# Altium PCB LP_ECG-X02.PcbDoc (part 2 of 2)
Units mil, origin at the board's own origin, x right, y up, seen from the top; angles counter-clockwise.
Board outline 960.05 x 640 mil, 2 copper layers (Top Layer, Bottom Layer), stack 5.556 mil thick; 71 components, 50 nets, 250 pads, 54 vias.
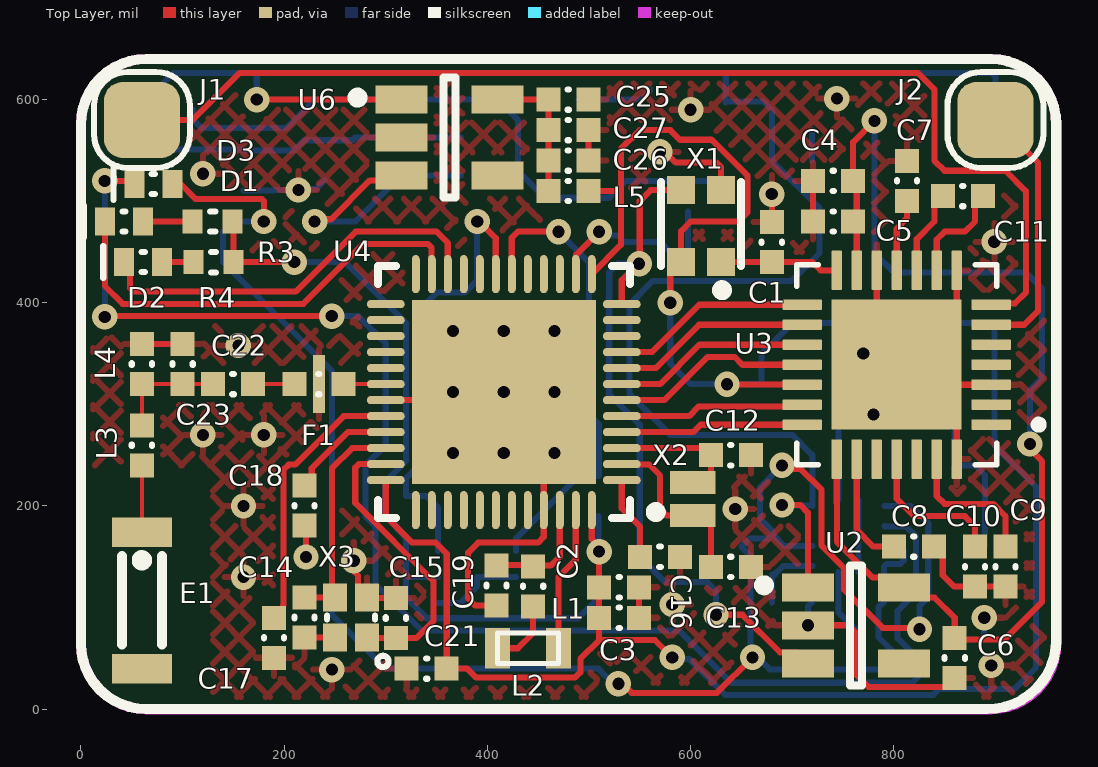
[diagram p0: Top Layer view]

## Part data (continued)
L1: library part I-0402(1005), "General Purpose Inductor, 0.015uH, 5%, 1 Element, Ferrite-Core, SMD, 0402", Case Code (Imperial)=0402, Case Code (Metric)=1005, Current Rating=320mA, DC Resistance (DCR)=460mR, Inductance Tolerance=5%, Manufacturer="Taiyo Yuden", Manufacturer Part Number=HK100515NJ-T, Max DC Current=300mA, Max Operating Temperature=125°C, Min Operating Temperature=-55°C, Package Quantity=10000, Self Resonant Frequency=2.3GHz, Supplier Part Number 1=587-1521-1-ND, Test Frequency=100MHz, Body Material=Ceramic, Case/Package=0402, Category="Fixed Inductors", ComponentLink1Description=https://datasheet.ciiva.com:443/pdfs/VipMasterIC/IC/TAIY/TAIY-S-A0009098652/TAIY-S-A0009098648-1.pdf?src-supplier=IHS+Markit, ComponentLink1URL=https://datasheet.ciiva.com:443/pdfs/VipMasterIC/IC/TAIY/TAIY-S-A0009098652/TAIY-S-A0009098648-1.pdf?src-supplier=IHS+Markit, ComponentLink2Description=https://datasheet.ciiva.com/6688/hk100515nj-t-ss-6688640.pdf?src-supplier=Digi-Key, ComponentLink2URL=https://datasheet.ciiva.com/6688/hk100515nj-t-ss-6688640.pdf?src-supplier=Digi-Key, ComponentLink3Description=https://datasheet.ciiva.com/8498/hk100515nj-t-ss-8498917.pdf?src-supplier=Avnet, ComponentLink3URL=https://datasheet.ciiva.com/8498/hk100515nj-t-ss-8498917.pdf?src-supplier=Avnet, ComponentLink4Description=https://datasheet.ciiva.com/26871/getdatasheetpartid-645793-26871605.pdf?src-supplier=Verical, ComponentLink4URL=https://datasheet.ciiva.com/26871/getdatasheetpartid-645793-26871605.pdf?src-supplier=Verical, ComponentLink5Description=https://datasheet.ciiva.com/15986/1443hk100515nj-t-15986294.pdf?src-supplier=Onlinecomponents.com, ComponentLink5URL=https://datasheet.ciiva.com/15986/1443hk100515nj-t-15986294.pdf?src-supplier=Onlinecomponents.com, ComponentLink6Description=https://datasheet.ciiva.com/30215/1387hk100515nj-t-30215366.pdf?src-supplier=Onlinecomponents.com, ComponentLink6URL=https://datasheet.ciiva.com/30215/1387hk100515nj-t-30215366.pdf?src-supplier=Onlinecomponents.com, Core Material=Ferrite,Ceramic, DC Current=320mA, Depth=0.55mm, Halogen Free="Halogen Free", Height=0.5mm, Height - Seated (Max)=0.022inch, Inductance=15nH, Lead Free=Exempt, Length=1.05mm, Military Standard=Not, Mount="Surface Mount", Number of Pins=2, Packaging="Tape and Reel", Pricing 1="1=0.10000, 10=0.02900, 100=0.01960, 500=0.01582, 1000=0.01351, 2500=0.01208 (USD)", Q Factor=8, Radiation Hardening=No, REACH SVHC=Unknown, RoHS=Yes, Shielding=Unshielded, Stock 1=127125, Supplier 1=Digi-Key, Termination=SMD/SMT, Tolerance=5%, Width=0.02inch
L2: library part I-0603(1608), "General Purpose Inductor, 10uH, 10%, 1 Element, Ferrite-Core, SMD, 0603", Case Code (Imperial)=0603, Case Code (Metric)=1608, Current Rating=380mA, DC Resistance (DCR)=468mR, Inductance Tolerance=10%, Manufacturer="Taiyo Yuden", Manufacturer Part Number=CBMF1608T100K, Max Operating Temperature=105°C, Min Operating Temperature=-40°C, Package Quantity=3000, Saturation Current=115mA, Self Resonant Frequency=32MHz, Supplier Part Number 1=587-1720-1-ND, Test Frequency=2.52MHz, Case/Package=0603, Category="Fixed Inductors", ComponentLink1Description=https://datasheet.ciiva.com:443/pdfs/VipMasterIC/IC/TAIY/TAIY-S-A0009098652/TAIY-S-A0009097792-1.pdf?src-supplier=IHS+Markit, ComponentLink1URL=https://datasheet.ciiva.com:443/pdfs/VipMasterIC/IC/TAIY/TAIY-S-A0009098652/TAIY-S-A0009097792-1.pdf?src-supplier=IHS+Markit, ComponentLink2Description=https://datasheet.ciiva.com/1040/cbmf1608t100k-ss-1040608.pdf?src-supplier=Digi-Key, ComponentLink2URL=https://datasheet.ciiva.com/1040/cbmf1608t100k-ss-1040608.pdf?src-supplier=Digi-Key, ComponentLink3Description=https://datasheet.ciiva.com/26871/getdatasheetpartid-638595-26871191.pdf?src-supplier=Verical, ComponentLink3URL=https://datasheet.ciiva.com/26871/getdatasheetpartid-638595-26871191.pdf?src-supplier=Verical, ComponentLink4Description=https://datasheet.ciiva.com/15981/521cbmf1608t100k-15981672.pdf?src-supplier=Onlinecomponents.com, ComponentLink4URL=https://datasheet.ciiva.com/15981/521cbmf1608t100k-15981672.pdf?src-supplier=Onlinecomponents.com, ComponentLink5Description=https://datasheet.ciiva.com/46395/1521599-46395181.pdf?src-supplier=Element14, ComponentLink5URL=https://datasheet.ciiva.com/46395/1521599-46395181.pdf?src-supplier=Element14, Composition=Wirewound, Core Material=Ferrite, DC Current=380mA, Depth=1mm, Halogen Free="Halogen Free", Height=0.8mm, Height - Seated (Max)=0.039inch, Inductance=10uH, Lead Free="Lead Free", Length=0.063inch, Max DC Current=380mA, Military Standard=Not, Mount="Surface Mount", Packaging="Tape and Reel", Pricing 1="1=0.27000, 10=0.23900, 100=0.16450, 500=0.14054, 1000=0.10764 (USD)", Radiation Hardening=No, REACH SVHC=Unknown, RoHS=Yes, Shielding=Unshielded, Stock 1=148191, Supplier 1=Digi-Key, Termination=SMD/SMT, Tolerance=10%, Width=0.031inch
L3: library part I-0402(1005), "General Purpose Inductor, 0.0039uH, 5%, 1 Element, Ceramic-Core, SMD, 0402", Case/Size Code=0402, DC Resistance (DCR)=66mR, Inductor Application="RF INDUCTOR", Inductor Type="GENERAL PURPOSE INDUCTOR", Manufacturer=Bourns, Manufacturer Part Number=CW100505-3N9J, Max Operating Temperature=125°C, Min Operating Temperature=-55°C, Package Height=0.5mm, Package Length=1mm, Package Style=SMTMeter, Package Width=0.55mm, Rated Current-Max=840mA, Self Resonant Frequency=5.8GHz, Supplier Part Number 1=CW100505-3N9JCT-ND, Test Frequency=250MHz, Tolerance=5%, Category="Fixed Inductors", ComponentLink1Description=https://datasheet.ciiva.com:443/pdfs/VipMasterIC/IC/BOUR/BOUR-S-A0006522652/BOUR-S-A0006522652-1.pdf?src-supplier=IHS+Markit, ComponentLink1URL=https://datasheet.ciiva.com:443/pdfs/VipMasterIC/IC/BOUR/BOUR-S-A0006522652/BOUR-S-A0006522652-1.pdf?src-supplier=IHS+Markit, ComponentLink2Description=https://datasheet.ciiva.com/7848/1758342-7848024.pdf?src-supplier=Element14, ComponentLink2URL=https://datasheet.ciiva.com/7848/1758342-7848024.pdf?src-supplier=Element14, ComponentLink3Description=https://datasheet.ciiva.com/6688/cw100505-6688918.pdf?src-supplier=Digi-Key, ComponentLink3URL=https://datasheet.ciiva.com/6688/cw100505-6688918.pdf?src-supplier=Digi-Key, ComponentLink4Description=https://datasheet.ciiva.com/6688/cw100505-6688919.pdf?src-supplier=Digi-Key, ComponentLink4URL=https://datasheet.ciiva.com/6688/cw100505-6688919.pdf?src-supplier=Digi-Key, ComponentLink5Description=https://datasheet.ciiva.com/3079/cw100505-3079090.pdf?src-supplier=Avnet, ComponentLink5URL=https://datasheet.ciiva.com/3079/cw100505-3079090.pdf?src-supplier=Avnet, ComponentLink6Description=https://datasheet.ciiva.com/3079/cw100505-3079776.pdf?src-supplier=Avnet, ComponentLink6URL=https://datasheet.ciiva.com/3079/cw100505-3079776.pdf?src-supplier=Avnet, Construction=Chip, Core Material=Ceramic, Inductance=0.0039uH, JESD-609 Code=e4, Number of Functions=1, Number of Pins=2, Packaging="Tape and Reel", Pricing 1="1=0.34000, 10=0.29900, 25=0.26160, 50=0.22440, 100=0.20570, 250=0.18700, 500=0.17578, 1000=0.13464, 2500=0.12716 (USD)", Quality Factor-Min (at L-nom)=20, REACH SVHC=Yes, RoHS=Yes, RoHS Compliant=Yes, Shape/Size Description="RECTANGULAR PACKAGE", Shielding=Unshielded, Stock 1=14179, Supplier 1=Digi-Key, Surface Mount=Yes, Terminal Finish=Gold, Terminal Placement="Dual Ended", Termination="One Surface"
L4: library part I-0402(1005), "General Purpose Inductor, 0.0027uH, 2%, 1 Element, SMD, 0402", DC Resistance (DCR)=47mR, Inductor Application="RF INDUCTOR", Inductor Type="GENERAL PURPOSE INDUCTOR", Manufacturer=Murata, Manufacturer Part Number=LQW15AN2N7G8ZD, Max Operating Temperature=125°C, Min Operating Temperature=-55°C, Rated Current-Max=1.5A, Self Resonant Frequency=14GHz, Supplier Part Number 1=490-15398-1-ND, Test Frequency=100MHz, Tolerance=2%, Category="Fixed Inductors", ComponentLink1Description=https://datasheet.ciiva.com:443/pdfs/VipMasterIC/IC/MURE/MURE-S-A0006159688/MURE-S-A0006159688-1.pdf?src-supplier=IHS+Markit, ComponentLink1URL=https://datasheet.ciiva.com:443/pdfs/VipMasterIC/IC/MURE/MURE-S-A0006159688/MURE-S-A0006159688-1.pdf?src-supplier=IHS+Markit, Inductance=0.0027uH, Number of Functions=1, Number of Pins=2, Pricing 1="1=0.27000, 10=0.24300, 25=0.21560, 50=0.18320, 100=0.16170, 250=0.14824, 500=0.13476, 1000=0.11319, 2500=0.09702 (USD)", Quality Factor-Min (at L-nom)=28, REACH SVHC=Yes, Reference Standard=AEC-Q200, RoHS=Yes, RoHS Compliant=Yes, Shape/Size Description="RECTANGULAR PACKAGE", Shielding=Unshielded, Stock 1=26747, Supplier 1=Digi-Key, Surface Mount=Yes, Terminal Placement="Dual Ended", Termination="One Surface"
L5: library part "Inductor Iron", "General Purpose Inductor, 1uH, 20%, 1 Element, Ferrite-Core, SMD, 0402", Case Code (Imperial)=0402, Case Code (Metric)=1005, Current Rating=450mA, DC Resistance (DCR)=455mR, Manufacturer=TDK, Manufacturer Part Number=MLZ1005M1R0WT000, Max Operating Temperature=125°C, Min Operating Temperature=-55°C, Package Quantity=10000, Saturation Current=100mA, Self Resonant Frequency=170MHz, Supplier Part Number 1=445-6379-1-ND, Test Frequency=2MHz, Tolerance=20%, Case/Package=0402, Category="Fixed Inductors", ComponentLink1Description=https://datasheet.ciiva.com:443/pdfs/VipMasterIC/IC/TDKC/TDKC-S-A0006811779/TDKC-S-A0006811779-1.pdf?src-supplier=IHS+Markit, ComponentLink1URL=https://datasheet.ciiva.com:443/pdfs/VipMasterIC/IC/TDKC/TDKC-S-A0006811779/TDKC-S-A0006811779-1.pdf?src-supplier=IHS+Markit, ComponentLink2Description=https://datasheet.ciiva.com/29699/inductor-commercial-decoupling-mlz-en-29699052.pdf?src-supplier=Digi-Key, ComponentLink2URL=https://datasheet.ciiva.com/29699/inductor-commercial-decoupling-mlz-en-29699052.pdf?src-supplier=Digi-Key, ComponentLink3Description=https://datasheet.ciiva.com/29699/inductor-commercial-decoupling-mlz-en-29699053.pdf?src-supplier=Digi-Key, ComponentLink3URL=https://datasheet.ciiva.com/29699/inductor-commercial-decoupling-mlz-en-29699053.pdf?src-supplier=Digi-Key, Core Material=Ferrite, Height - Seated (Max)=0.022inch, Inductance=1uH, Length=0.039inch, Mount="Surface Mount", Packaging="Tape and Reel", Pricing 1="1=0.29000, 10=0.25800, 100=0.17710, 500=0.15134, 1000=0.11592, 2500=0.10948 (USD)", RoHS=Yes, Shielding=Shielded, Supplier 1=Digi-Key, Width=0.02inch
L6: library part WIRELESS_CHARGING_COIL, "General Purpose Inductor, 11.8uH, 10%, 1 Element", Current Rating=700mA, DC Resistance (DCR)=750mR, Inductance=11.8uH, Inductance Tolerance=10%, Manufacturer="Wurth Electronics", Manufacturer Part Number=760308101219, Max Operating Temperature=105°C, Min Operating Temperature=-20°C, Saturation Current=1.5A, Self Resonant Frequency=22MHz, Supplier Part Number 1=732-9675-ND, ComponentLink1Description=https://datasheet.ciiva.com:443/pdfs/VipMasterIC/IC/MIDC/MIDC-S-A0003386501/MIDC-S-A0003386501-1.pdf?src-supplier=IHS+Markit, ComponentLink1URL=https://datasheet.ciiva.com:443/pdfs/VipMasterIC/IC/MIDC/MIDC-S-A0003386501/MIDC-S-A0003386501-1.pdf?src-supplier=IHS+Markit, ComponentLink2Description=http://www.farnell.com/datasheets/2039993.pdf?src-supplier=Farnell, ComponentLink2URL=http://www.farnell.com/datasheets/2039993.pdf?src-supplier=Farnell, ComponentLink3Description=http://www.farnell.com/datasheets/2039993.pdf?src-supplier=Element14, ComponentLink3URL=http://www.farnell.com/datasheets/2039993.pdf?src-supplier=Element14, Height=0.02inch, Logic Function=Receiver, Pricing 1="1=7.43000, 10=7.04000, 32=6.49000, 64=5.94000, 128=5.17000 (USD)", REACH SVHC=Unknown, RoHS=Yes, Stock 1=168, Supplier 1=Digi-Key, Tolerance=10%
R1 R2: library part R-0402(1005), "Fixed Resistor, Metal Glaze/thick Film, 0.0625W, 10000ohm, 50V, 1% +/-Tol, 100ppm/Cel, Surface Mount, 0402", Manufacturer=Yageo, Manufacturer Part Number=AC0402FR-0710KL, Max Operating Temperature=155°C, Min Operating Temperature=-55°C, Package Height=0.32mm, Package Length=1mm, Package Shape=Rectangular, Package Style=SMTMeter, Package Width=0.5mm, Rated Power Dissipation (P)=62.5mW, Rated Temperature=70°C, Resistor Type="FIXED RESISTOR", Supplier Part Number 1=YAG3436CT-ND, Temperature Coefficient=100ppm/°C, Tolerance=1%, Working Voltage=50V, Additional Feature="LASER TRIMMABLE", Category="Chip SMD Resistors", ComponentLink1Description=https://datasheet.ciiva.com:443/pdfs/VipMasterIC/IC/YAGO/YAGO-S-A0003597364/YAGO-S-A0003597364-1.pdf?src-supplier=IHS+Markit, ComponentLink1URL=https://datasheet.ciiva.com:443/pdfs/VipMasterIC/IC/YAGO/YAGO-S-A0003597364/YAGO-S-A0003597364-1.pdf?src-supplier=IHS+Markit, ComponentLink2Description=https://datasheet.ciiva.com/12656/pyu-ac-51-rohs-l-2-12656634.pdf?src-supplier=Mouser, ComponentLink2URL=https://datasheet.ciiva.com/12656/pyu-ac-51-rohs-l-2-12656634.pdf?src-supplier=Mouser, Construction=Chip, JESD-609 Code=e3, Mount="Surface Mount", Number of Pins=2, Packaging="Tape and Reel", Pricing 1="1=0.10000, 10=0.01900, 100=0.00780, 1000=0.00350, 2500=0.00304, 5000=0.00251 (USD)", Reference Standard=AEC-Q200, Resistance=10kR, RoHS=Yes, Size Code=0402, Stock 1=281455, Supplier 1=Digi-Key, Technology="METAL GLAZE/THICK FILM", Terminal Finish=Nickel, Termination=Wraparound
R3 R4: library part R-0402(1005), "Fixed Resistor, Thin Film, 0.0625W, 422ohm, 50V, 0.1% +/-Tol, 25ppm/Cel, Surface Mount, 0402", Case Code (Imperial)=0402, Case Code (Metric)=1005, Manufacturer=Yageo, Manufacturer Part Number=RT0402BRD07422RL, Max Operating Temperature=125°C, Min Operating Temperature=-55°C, Power Rating=62.5mW, Supplier Part Number 1=YAG4263CT-ND, Temperature Coefficient=25ppm/°C, Tolerance=0.1%, Voltage Rating=50V, Case/Package=0402, Category="Chip SMD Resistors", ComponentLink1Description=https://datasheet.ciiva.com:443/pdfs/VipMasterIC/IC/YAGO/YAGO-S-A0008510989/YAGO-S-A0008510989-1.pdf?src-supplier=IHS+Markit, ComponentLink1URL=https://datasheet.ciiva.com:443/pdfs/VipMasterIC/IC/YAGO/YAGO-S-A0008510989/YAGO-S-A0008510989-1.pdf?src-supplier=IHS+Markit, ComponentLink2Description=https://datasheet.ciiva.com/12705/pyu-rt-1-to-0-05-rohs-l-4-12705867.pdf?src-supplier=Mouser, ComponentLink2URL=https://datasheet.ciiva.com/12705/pyu-rt-1-to-0-05-rohs-l-4-12705867.pdf?src-supplier=Mouser, Height=350um, Lead Free="Lead Free", Length=1mm, Packaging="Tape and Reel", Pricing 1="1=0.39000, 10=0.27800, 100=0.11140, 1000=0.05488, 2500=0.05084, 5000=0.04600 (USD)", Resistance=422R, RoHS=Yes, Stock 1=9302, Supplier 1=Digi-Key, Termination=SMD/SMT, Voltage Rating (DC)=50V, Width=500um
R5 R6 R7 R8: library part R-0402(1005), "Fixed Resistor, Metal Glaze/thick Film, 0.0625W, 0ohm, Surface Mount, 0402", Manufacturer=Yageo, Manufacturer Part Number=AC0402JR-070RL, Max Operating Temperature=155°C, Min Operating Temperature=-55°C, Package Height=0.32mm, Package Length=1mm, Package Shape=Rectangular, Package Style=SMTMeter, Package Width=0.5mm, Rated Power Dissipation (P)=62.5mW, Rated Temperature=70°C, Resistor Type="FIXED RESISTOR", Supplier Part Number 1=311-0.0LBCT-ND, Category="Chip SMD Resistors", ComponentLink1Description=https://datasheet.ciiva.com:443/pdfs/VipMasterIC/IC/YAGO/YAGO-S-A0003597364/YAGO-S-A0003597364-1.pdf?src-supplier=IHS+Markit, ComponentLink1URL=https://datasheet.ciiva.com:443/pdfs/VipMasterIC/IC/YAGO/YAGO-S-A0003597364/YAGO-S-A0003597364-1.pdf?src-supplier=IHS+Markit, ComponentLink2Description=http://www.mouser.com/ds/2/447/yageodocoutput-1111992.pdf?src-supplier=Mouser, ComponentLink2URL=http://www.mouser.com/ds/2/447/yageodocoutput-1111992.pdf?src-supplier=Mouser, ComponentLink3Description=http://www.yageo.com/NewPortal/yageodocoutput?fileName=/pdf/R-Chip/PYu-AC_51_RoHS_L_6.pdf&src-supplier=Digi-Key, ComponentLink3URL=http://www.yageo.com/NewPortal/yageodocoutput?fileName=/pdf/R-Chip/PYu-AC_51_RoHS_L_6.pdf&src-supplier=Digi-Key, ComponentLink4Description=http://www.yageo.com/documents/recent/PYu-AC_51_RoHS_L_2_revised.pdf?src-supplier=Future+Electronics, ComponentLink4URL=http://www.yageo.com/documents/recent/PYu-AC_51_RoHS_L_2_revised.pdf?src-supplier=Future+Electronics, Construction=Chip, JESD-609 Code=e3, Mount="Surface Mount", Number of Pins=2, Packaging="Tape and Reel", Pricing 1="1=0.10000, 10=0.01800, 25=0.01320, 50=0.01000, 100=0.00740, 250=0.00564, 500=0.00450, 1000=0.00331, 5000=0.00238 (USD)", REACH SVHC=Yes, Reference Standard=AEC-Q200, Resistance=0R, RoHS=Yes, RoHS Compliant=Yes, Size Code=0402, Stock 1=1061562, Supplier 1=Digi-Key, Technology="METAL GLAZE/THICK FILM", Terminal Finish=Nickel, Termination=Wraparound
R9 R10: library part R-0402(1005), "Fixed Resistor, Metal Glaze/thick Film, 0.0625W, 1000000ohm, 50V, 1% +/-Tol, 100ppm/Cel, Surface Mount, 0402", Manufacturer=Yageo, Manufacturer Part Number=AC0402FR-071ML, Max Operating Temperature=155°C, Min Operating Temperature=-55°C, Package Height=0.32mm, Package Length=1mm, Package Shape=Rectangular, Package Style=SMTMeter, Package Width=0.5mm, Rated Power Dissipation (P)=62.5mW, Rated Temperature=70°C, Resistor Type="FIXED RESISTOR", Supplier Part Number 1=YAG3450CT-ND, Temperature Coefficient=100ppm/°C, Tolerance=1%, Working Voltage=50V, Additional Feature="LASER TRIMMABLE", Category="Chip SMD Resistors", ComponentLink1Description=https://datasheet.ciiva.com:443/pdfs/VipMasterIC/IC/YAGO/YAGO-S-A0003597364/YAGO-S-A0003597364-1.pdf?src-supplier=IHS+Markit, ComponentLink1URL=https://datasheet.ciiva.com:443/pdfs/VipMasterIC/IC/YAGO/YAGO-S-A0003597364/YAGO-S-A0003597364-1.pdf?src-supplier=IHS+Markit, ComponentLink2Description=http://components.arrow.com/part/dataview/0323_03348700?src-supplier=Arrow+Europe, ComponentLink2URL=http://components.arrow.com/part/dataview/0323_03348700?src-supplier=Arrow+Europe, ComponentLink3Description=http://www.yageo.com/documents/recent/PYu-AC_51_RoHS_L_2.pdf?src-supplier=Mouser, ComponentLink3URL=http://www.yageo.com/documents/recent/PYu-AC_51_RoHS_L_2.pdf?src-supplier=Mouser, ComponentLink4Description=http://www.yageo.com/NewPortal/yageodocoutput?fileName=/pdf/R-Chip/PYu-AC_51_RoHS_L_6.pdf&src-supplier=Digi-Key, ComponentLink4URL=http://www.yageo.com/NewPortal/yageodocoutput?fileName=/pdf/R-Chip/PYu-AC_51_RoHS_L_6.pdf&src-supplier=Digi-Key, ComponentLink5Description=http://www.yageo.com/documents/recent/PYu-AC_51_RoHS_L_2_revised.pdf?src-supplier=Future+Electronics, ComponentLink5URL=http://www.yageo.com/documents/recent/PYu-AC_51_RoHS_L_2_revised.pdf?src-supplier=Future+Electronics, Construction=Chip, JESD-609 Code=e3, Mount="Surface Mount", Number of Pins=2, Packaging="Tape and Reel", Pricing 1="1=0.10000, 10=0.01900, 100=0.00780, 1000=0.00350, 2500=0.00304, 5000=0.00251 (USD)", Reference Standard=AEC-Q200, Resistance=1MR, RoHS=Yes, Size Code=0402, Stock 1=11166, Supplier 1=Digi-Key, Technology="METAL GLAZE/THICK FILM", Terminal Finish=Nickel, Termination=Wraparound
U1: library part bceab6869a9cb85cf5675529ee35ce4, "TEMPERATURE SENSOR", Ambient Temperature Range High=+150°C, Ambient Temperature Range Low=-55°C, Manufacturer="Texas Instruments", Max Operating Temperature=150°C, Max Supply Voltage=5.5V, Min Supply Voltage=1.8V, Operating Supply Current=3.5-16uA, Package=DRV0006A, Supplier Part Number 1=296-51834-1-ND, Temperature="-55°C to +150°C", Automotive=No, Category=IC, ComponentLink1Description=https://www.ti.com:443/lit/ds/symlink/tmp117.pdf?src-supplier=IHS+Markit, ComponentLink1URL=https://www.ti.com:443/lit/ds/symlink/tmp117.pdf?src-supplier=IHS+Markit, ComponentLink2Description=Datasheet, ComponentLink2URL=http://www.ti.com/lit/ds/symlink/tmp117.pdf, ComponentLink3Description=http://www.ti.com/lit/gpn/tmp117?src-supplier=Digi-Key, ComponentLink3URL=http://www.ti.com/lit/gpn/tmp117?src-supplier=Digi-Key, Device Class L1=Sensors, Device Class L2="Temperature and Humidity Sensors", Device Class L3=unset, Digikey Description="TEMPERATURE SENSOR", Height=0.8mm, Interface=I2C,2-Wire,SMBus, Ipc Land Pattern Name=DFN200X200X80-6, Lead Free=Yes, Manufacturer Part Number=TMP117AIDRVR, Max Junction Temp=+150°C, Min Operating Temperature=-55°C, Mount="Surface Mount", Octopart=https://octopart.com/tmp117aidrvr-texas+instruments-95511044, Output Type=I2C, Packaging="Cut Tape", Pricing 1="1=8.02000, 5=7.07600, 10=6.25000, 25=5.07040, 50=4.48100, 100=4.36300, 500=3.65552, 1000=3.41968 (USD)", Resolution=16bits, RoHS=TRUE, Standoff Height=0mm, Stock 1=3558, Supplier 1=Digi-Key, Temperature Range High=+150°C, Temperature Range Low=-55°C
U2: "Fixed Positive LDO Regulator", Manufacturer=ABLIC, Supplier Part Number 1=1662-S-1318A18-M5T1U4CT-ND, ComponentLink1Description=https://datasheet.ciiva.com:443/pdfs/VipMasterIC/IC/ABLI/ABLI-S-A0006756278/ABLI-S-A0006756278-1.pdf?src-supplier=IHS+Markit, ComponentLink1URL=https://datasheet.ciiva.com:443/pdfs/VipMasterIC/IC/ABLI/ABLI-S-A0006756278/ABLI-S-A0006756278-1.pdf?src-supplier=IHS+Markit, Manufacturer Part Number=S-1318A18-M5T1U4, Pricing 1="1=1.15000, 10=1.02600, 25=0.97360, 100=0.79970, 250=0.74752, 500=0.66060, 1000=0.52152 (USD)", REACH SVHC="No SVHC", Regulator Type="FIXED POSITIVE SINGLE OUTPUT LDO REGULATOR", RoHS=Yes, RoHS Compliant=No, Stock 1=2394, Supplier 1=Digi-Key
U3: "Analog Circuit, 1 Func, CMOS", Manufacturer=Maxim, Max Operating Temperature=70°C, Max Supply Voltage=2V, Min Operating Temperature=0°C, Min Supply Voltage=1.2V, Supplier Part Number 1=MAX30003CTI+-ND, Category="RF Semiconductors and Devices", ComponentLink1Description=https://datasheet.ciiva.com:443/pdfs/VipMasterIC/IC/MAXM/MAXM-S-A0009086108/MAXM-S-A0009086108-1.pdf?src-supplier=IHS+Markit, ComponentLink1URL=https://datasheet.ciiva.com:443/pdfs/VipMasterIC/IC/MAXM/MAXM-S-A0009086108/MAXM-S-A0009086108-1.pdf?src-supplier=IHS+Markit, ComponentLink2Description=http://www.farnell.com/datasheets/2159846.pdf?src-supplier=Farnell, ComponentLink2URL=http://www.farnell.com/datasheets/2159846.pdf?src-supplier=Farnell, ComponentLink3Description=https://pdfserv.maximintegrated.com/en/an/MAX-ECG-MONITOR-User-Guide.pdf?src-supplier=Digi-Key, ComponentLink3URL=https://pdfserv.maximintegrated.com/en/an/MAX-ECG-MONITOR-User-Guide.pdf?src-supplier=Digi-Key, ComponentLink4Description=http://www.farnell.com/datasheets/2159846.pdf?src-supplier=Element14, ComponentLink4URL=http://www.farnell.com/datasheets/2159846.pdf?src-supplier=Element14, Manufacturer Part Number=MAX30003CTI+, Number of Pins=28, Pricing 1="1=8.21000, 10=7.41200, 25=7.06760, 100=5.86090, 250=5.34380, 500=4.99902, 1000=4.98888 (USD)", REACH SVHC="No SVHC", RoHS=No, Stock 1=286, Supplier 1=Digi-Key
U4: library part NRSC-NRF52832-QF-48, "Telecom Circuit, 1-Func", Manufacturer="Nordic Semiconductor", Manufacturer Part Number=NRF52832-QFAB-R, Max Operating Temperature=85°C, Min Operating Temperature=-40°C, Package Code=HVQCCN, Package Shape=Square, Package Style="CHIP CARRIER, HEAT SINK/SLUG, VERY THIN PROFILEMeter", Supplier Part Number 1=1490-1055-1-ND, Supply Voltage-Nom=3V, Temperature Grade=INDUSTRIAL, Category="RF Receivers, Transceivers", ComponentLink1Description=https://datasheet.ciiva.com:443/pdfs/VipMasterIC/IC/NRSA/NRSA-S-A0002414264/NRSA-S-A0002414264-1.pdf?src-supplier=IHS+Markit, ComponentLink1URL=https://datasheet.ciiva.com:443/pdfs/VipMasterIC/IC/NRSA/NRSA-S-A0002414264/NRSA-S-A0002414264-1.pdf?src-supplier=IHS+Markit, ComponentLink2Description=http://infocenter.nordicsemi.com/pdf/nRF52832_PB_v1.7.pdf?src-supplier=Digi-Key, ComponentLink2URL=http://infocenter.nordicsemi.com/pdf/nRF52832_PB_v1.7.pdf?src-supplier=Digi-Key, ComponentLink3Description=http://infocenter.nordicsemi.com/pdf/nRF52832_PS_v1.4.pdf?src-supplier=Digi-Key, ComponentLink3URL=http://infocenter.nordicsemi.com/pdf/nRF52832_PS_v1.4.pdf?src-supplier=Digi-Key, Height - Seated (Max)=0.95mm, JESD-30 Code=S-XQCC-N48, Length=6mm, Moisture Sensitivity Level=2, Number of Functions=1, Number of Pins=48, Pricing 1="1=3.64000, 10=3.25000, 25=2.92520, 100=2.66500, 250=2.40500, 500=2.15800, 1000=1.82000 (USD)", RoHS=No, Stock 1=6612, Supplier 1=Digi-Key, Surface Mount=Yes, Telecom IC Type="TELECOM CIRCUIT", Terminal Form="No Lead", Terminal Pitch=0.4mm, Terminal Position=QUAD, Width=6mm
U5: "Power Supply Support Circuit, Adjustable, 1 Channel, CMOS", Manufacturer="Analog Devices", Manufacturer Part Number=LTC4124EV#TRMPBF, Supplier Part Number 1=LTC4124EV#TRMPBFCT-ND, Category="Battery Management", ComponentLink1Description=https://datasheet.ciiva.com:443/pdfs/VipMasterIC/IC/ANDI/ANDI-S-A0007901877/ANDI-S-A0007901877-1.pdf?src-supplier=IHS+Markit, ComponentLink1URL=https://datasheet.ciiva.com:443/pdfs/VipMasterIC/IC/ANDI/ANDI-S-A0007901877/ANDI-S-A0007901877-1.pdf?src-supplier=IHS+Markit, Pricing 1="1=6.36000, 10=5.74300, 25=5.47600, 100=4.75470, 250=4.54104 (USD)", RoHS=Yes, Supplier 1=Digi-Key
U6: "Fixed Positive LDO Regulator", Manufacturer=ABLIC, Supplier Part Number 1=1662-S-1318A30-M5T1U4CT-ND, Manufacturer Part Number=S-1318A30-M5T1U4, RoHS=Yes, Supplier 1=Digi-Key
U7: library part CMP-04937-000003-1, "LP HALL 32FBDBZR", Case/Package=TO-236-3, Manufacturer="Texas Instruments", Max Operating Temperature=85°C, Max Output Current=5mA, Max Supply Current=2.6mA, Min Operating Temperature=-40°C, Supplier Part Number 1=296-47323-1-ND, Category="Integrated Circuits (ICs)", ComponentLink1Description=https://www.ti.com:443/lit/ds/symlink/drv5032.pdf?src-supplier=IHS+Markit, ComponentLink1URL=https://www.ti.com:443/lit/ds/symlink/drv5032.pdf?src-supplier=IHS+Markit, ComponentLink2Description=Datasheet, ComponentLink2URL=http://www.ti.com/lit/ds/symlink/drv5032.pdf, ComponentLink3Description=http://www.ti.com/lit/ds/symlink/drv5032.pdf?src-supplier=Digi-Key, ComponentLink3URL=http://www.ti.com/lit/ds/symlink/drv5032.pdf?src-supplier=Digi-Key, ComponentLink4Description=http://www.ti.com/general/docs/suppproductinfo.tsp?distId=10&amp;gotoUrl=http%3A%2F%2Fwww.ti.com%2Flit%2Fgpn%2Fdrv5032&src-supplier=Digi-Key, ComponentLink4URL=http://www.ti.com/general/docs/suppproductinfo.tsp?distId=10&amp;gotoUrl=http%3A%2F%2Fwww.ti.com%2Flit%2Fgpn%2Fdrv5032&src-supplier=Digi-Key, Manufacturer Part Number=DRV5032FBDBZR, Packaging="Cut Tape", Pricing 1="1=0.80000, 5=0.76600, 10=0.66600, 25=0.58520, 50=0.48600, 100=0.41400, 500=0.36000, 1000=0.31500 (USD)", RoHS=No, Sensing Method="Hall Effect", Stock 1=6326, Supplier 1=Digi-Key
U8: library part CMP-0859-00228-3, "CONFIGURABLE MULTIPLE-FUNCTION GATE, DBV0006A, LARGE T&R", Case/Package=SOT-23, High Level Output Current=-32mA, Low Level Output Current=32mA, Manufacturer="Texas Instruments", Max Operating Temperature=125°C, Max Supply Voltage=5.5V, Min Operating Temperature=-40°C, Min Supply Voltage=1.65V, Package Quantity=3000, Quiescent Current=10uA, Supplier Part Number 1=296-15574-1-ND, Category="Logic Gates", ComponentLink1Description=https://www.ti.com:443/lit/ds/symlink/sn74lvc1g57.pdf?src-supplier=IHS+Markit, ComponentLink1URL=https://www.ti.com:443/lit/ds/symlink/sn74lvc1g57.pdf?src-supplier=IHS+Markit, ComponentLink2Description=https://datasheet.ciiva.com/15090/getdatasheetpartid-173082-15090973.pdf?src-supplier=Verical, ComponentLink2URL=https://datasheet.ciiva.com/15090/getdatasheetpartid-173082-15090973.pdf?src-supplier=Verical, ComponentLink3Description=https://datasheet.ciiva.com/1880/sn74lvc1g57-1880083.pdf?src-supplier=Digi-Key, ComponentLink3URL=https://datasheet.ciiva.com/1880/sn74lvc1g57-1880083.pdf?src-supplier=Digi-Key, ComponentLink4Description=https://datasheet.ciiva.com/1880/sn74lvc1g57-1880084.pdf?src-supplier=Digi-Key, ComponentLink4URL=https://datasheet.ciiva.com/1880/sn74lvc1g57-1880084.pdf?src-supplier=Digi-Key, ComponentLink5Description=https://datasheet.ciiva.com/46395/1882763-46395382.pdf?src-supplier=Element14, ComponentLink5URL=https://datasheet.ciiva.com/46395/1882763-46395382.pdf?src-supplier=Element14, ComponentLink6Description=https://datasheet.ciiva.com/46439/1834192-46439175.pdf?src-supplier=Element14, ComponentLink6URL=https://datasheet.ciiva.com/46439/1834192-46439175.pdf?src-supplier=Element14, ComponentLink7Description=https://datasheet.ciiva.com/7783/1771418-7783483.pdf?src-supplier=Element14, ComponentLink7URL=https://datasheet.ciiva.com/7783/1771418-7783483.pdf?src-supplier=Element14, ComponentLink8Description=https://datasheet.ciiva.com/7783/1771418-7783484.pdf?src-supplier=Element14, ComponentLink8URL=https://datasheet.ciiva.com/7783/1771418-7783484.pdf?src-supplier=Element14, ComponentLink9Description=https://datasheet.ciiva.com/1880/sn74lvc1g57-1880082.pdf?src-supplier=Digi-Key, ComponentLink9URL=https://datasheet.ciiva.com/1880/sn74lvc1g57-1880082.pdf?src-supplier=Digi-Key, ComponentLink10Description=https://datasheet.ciiva.com/48702/001075107-da-01-en-ic-mult-fun-sn74lvc1g57dbvr-sot-23-6-tid-48702374.pdf?src-supplier=Conrad, ComponentLink10URL=https://datasheet.ciiva.com/48702/001075107-da-01-en-ic-mult-fun-sn74lvc1g57dbvr-sot-23-6-tid-48702374.pdf?src-supplier=Conrad, Contact Plating=Gold, Height=1.3mm, Lead Free="Lead Free", Length=3.05mm, Logic Function="NAND GATE,AND GATE,NOR GATE,OR GATE,Inverter,Multi Function", Manufacturer Part Number=SN74LVC1G57DBVR, Max Output Current=32mA, Mount="Surface Mount", Number of Bits=1, Number of Circuits=1, Number of Elements=1, Number of Gates=1, Number of Input Lines=2, Number of Inputs=3, Number of Output Lines=1, Number of Outputs=1, Number of Pins=6, Output Current=32mA, Packaging="Tape and Reel", Pricing 1="1=0.37000, 10=0.28100, 25=0.25320, 100=0.17480, 250=0.14720, 500=0.11960, 1000=0.09200 (USD)", Propagation Delay=6.3ns, Radiation Hardening=No, REACH SVHC="No SVHC", RoHS=Yes, Schmitt Trigger Input=Yes, Stock 1=11185, Supplier 1=Digi-Key, Termination=SMD/SMT, Turn-On Delay Time=6.1ns, Weight=0.000229oz, Width=1.75mm
U9: library part CMP-0859-00176-3, "Single Positive-Edge-Triggered D-Type Flip-Flop, DBV0005A, LARGE T&R", Case/Package=SOT-23, Frequency=160MHz, High Level Output Current=-32mA, Low Level Output Current=32mA, Manufacturer="Texas Instruments", Max Operating Temperature=125°C, Max Supply Voltage=5.5V, Min Operating Temperature=-40°C, Min Supply Voltage=1.65V, Package Quantity=3000, Supplier Part Number 1=296-9851-1-ND, Category="Latches and Flip Flops", Clock Edge Trigger Type="Positive Edge", ComponentLink1Description=https://www.ti.com:443/lit/ds/symlink/sn74lvc1g80.pdf?src-supplier=IHS+Markit, ComponentLink1URL=https://www.ti.com:443/lit/ds/symlink/sn74lvc1g80.pdf?src-supplier=IHS+Markit, ComponentLink2Description=https://datasheet.ciiva.com/15091/getdatasheetpartid-71921-15091286.pdf?src-supplier=Verical, ComponentLink2URL=https://datasheet.ciiva.com/15091/getdatasheetpartid-71921-15091286.pdf?src-supplier=Verical, ComponentLink3Description=https://datasheet.ciiva.com/1854/sn74lvc1g80-1854761.pdf?src-supplier=Digi-Key, ComponentLink3URL=https://datasheet.ciiva.com/1854/sn74lvc1g80-1854761.pdf?src-supplier=Digi-Key, ComponentLink4Description=https://datasheet.ciiva.com/46395/1882705-46395835.pdf?src-supplier=Element14, ComponentLink4URL=https://datasheet.ciiva.com/46395/1882705-46395835.pdf?src-supplier=Element14, ComponentLink5Description=https://datasheet.ciiva.com/1854/sn74lvc1g80-1854762.pdf?src-supplier=Digi-Key, ComponentLink5URL=https://datasheet.ciiva.com/1854/sn74lvc1g80-1854762.pdf?src-supplier=Digi-Key, ComponentLink6Description=https://datasheet.ciiva.com/8055/1831218-8055610.pdf?src-supplier=Element14, ComponentLink6URL=https://datasheet.ciiva.com/8055/1831218-8055610.pdf?src-supplier=Element14, ComponentLink7Description=https://datasheet.ciiva.com/1854/sn74lvc1g80-1854763.pdf?src-supplier=Digi-Key, ComponentLink7URL=https://datasheet.ciiva.com/1854/sn74lvc1g80-1854763.pdf?src-supplier=Digi-Key, Lead Free="Lead Free", Logic Function=D-Type,Flip-Flop, Manufacturer Part Number=SN74LVC1G80DBVR, Max Frequency=160MHz, Mount="Surface Mount", Number of Bits=1, Number of Bits per Element=1, Number of Circuits=1, Number of Elements=1, Number of Gates=1, Number of Input Lines=1, Number of Output Lines=1, Number of Pins=5, Output Current=32mA, Packaging="Tape and Reel", Polarity=Inverting, Pricing 1="1=0.32000, 10=0.24000, 25=0.21000, 100=0.13590, 250=0.11252, 500=0.09000, 1000=0.06900 (USD)", Propagation Delay=9.9ns, Radiation Hardening=No, REACH SVHC="No SVHC", RoHS=Yes, Stock 1=12348, Supplier 1=Digi-Key, Turn-On Delay Time=1.1ns, Weight=0.000557oz
X1: library part OM-7605-C8-32.768KHZ, "Osc Xo 32.768KHZ SMD", Manufacturer="Micro Crystal", Manufacturer Part Number=OM-7605-C8-32.768KHZ-20PPM-TA-QC, Supplier Part Number 1=2195-OM-7605-C8-32.768KHZ-20PPM-TA-QCCT-ND, Pricing 1="1=1.94000, 10=1.85700, 50=1.81340, 100=1.55430, 500=1.51112 (USD)", RoHS=No, Stock 1=564, Supplier 1=Digi-Key
X2: library part CRYSTAL_32K768, "Parallel - Fundamental Quartz Crystal, 0.032768MHz Nom", Frequency Stability=0.0144%, Frequency Tolerance=20ppm, Load Capacitance=12.5pF, Manufacturer="ECS International", Manufacturer Part Number=ECS-.327-12.5-1210-TR, Max Operating Temperature=85°C, Min Operating Temperature=-40°C, Operating Frequency-Nom=0.032768, Series Resistance=90kR, Supplier Part Number 1=XC2282CT-ND, Aging="3 PPM/FIRST YEAR", Category=Crystals, ComponentLink1Description=https://datasheet.ciiva.com:443/pdfs/VipMasterIC/IC/ECSI/ECSI-S-A0009254912/ECSI-S-A0009254912-1.pdf?src-supplier=IHS+Markit, ComponentLink1URL=https://datasheet.ciiva.com:443/pdfs/VipMasterIC/IC/ECSI/ECSI-S-A0009254912/ECSI-S-A0009254912-1.pdf?src-supplier=IHS+Markit, ComponentLink2Description=https://www.ecsxtal.com/store/pdf/ECX-1210.pdf?src-supplier=Digi-Key, ComponentLink2URL=https://www.ecsxtal.com/store/pdf/ECX-1210.pdf?src-supplier=Digi-Key, Crystal/Resonator Type="PARALLEL - FUNDAMENTAL", Drive Level=0.1uW, Mount="Surface Mount", Pricing 1="1=1.38000, 10=1.32200, 50=1.29160, 100=1.10700, 500=1.07626, 1000=0.90713, 2500=0.86100 (USD)", RoHS=No, Stock 1=7776, Supplier 1=Digi-Key
X3: library part CRYSTAL_32MHz, "Parallel - Fundamental Quartz Crystal, 32MHz Nom", Case/Package=SMD/SMT, ESR (Equivalent Series Resistance)=80R, Frequency Stability=10ppm, Load Capacitance=8pF, Manufacturer=Diodes, Manufacturer Part Number=US3200005Z, Max Operating Temperature=70°C, Min Operating Temperature=-20°C, Supplier Part Number 1=US3200005ZCT-ND, Category=Crystals, ComponentLink1Description=https://datasheet.ciiva.com:443/pdfs/VipMasterIC/IC/DIOD/DIOD-S-A0002236499/DIOD-S-A0002236499-1.pdf?src-supplier=IHS+Markit, ComponentLink1URL=https://datasheet.ciiva.com:443/pdfs/VipMasterIC/IC/DIOD/DIOD-S-A0002236499/DIOD-S-A0002236499-1.pdf?src-supplier=IHS+Markit, ComponentLink2Description=https://media.digikey.com/pdf/Data%20Sheets/Pericom%20PDFs/US3200005Z_Ver.A.pdf?src-supplier=Digi-Key, ComponentLink2URL=https://media.digikey.com/pdf/Data%20Sheets/Pericom%20PDFs/US3200005Z_Ver.A.pdf?src-supplier=Digi-Key, Frequency=32MHz, Frequency Tolerance=10ppm, Height=0.014inch, Length=0.063inch, Mount="Surface Mount", Packaging="Tape and Reel", Pricing 1="1=1.45000, 10=1.38400, 50=1.35200, 100=1.15880, 500=1.12666, 1000=0.94961 (USD)", RoHS=Yes, Supplier 1=Digi-Key, Width=0.047inch

## Via types
v1: diameter 25, hole 12, Top Layer to Bottom Layer, 54 vias

## Nets (pads, with @x,y where several pads share a name; then routed paths per layer and width w, separated by ;. In a path a pad name is that pad's centre, name@x,y a point inside that pad or via, vN(x,y) a via of type N, cw(c..) or ccw(c..) an arc to the next point about the centre after c; other vN are vias at no path point)
\H\E\_\E\N\: U7.2 U8.6 U9.1 | length 640.9
  Bottom Layer w6: U7.2@110,590 110,580.81 118.81,572 202,572 230,600 U8.6 410,600 430,580 430,530 450,510 456.6,503.4 519.89,503.4 530,513.51 536.49,520 630,520 634.8,515.2 U9.1@634.8,501.73
\Q\_\O\U\T\: U8.1 U9.4 | length 74.8
  Bottom Layer w6: U8.1 551.19,600 560,608.81 U9.4@560,610
BLE_ANT: F1.1 U4.30 | length 41.8
  Top Layer w4: F1.1 U4.30
DEC4: C19.2 L1.1 U4.46 | length 112.8
  Top Layer w6: C19.2 409.63,142 443.69,142 L1.1 445.61,141.3 462.3,141.3 471.26,150.26 U4.46
ENABLE_LDO: R9.1 U6.3 U8.4 | length 266.8
  Top Layer w6: v1(230,480) 232.2,482.2 246.2,482.2 284.44,520.44 310.75,520.44 U6.3
  Bottom Layer w6: v1(230,480) 270,480 310,520 320,520 R9.1 U8.4
GND: C1.2 C2.2 C3.1 C4.2 C5.1 C6.2 C7.1 C8.2 C9.2 C10.2 C12.1 C13.1 C14.2 C15.2 C16.2 C17.2 C18.2 C19.1 C20.2 C21.2 C23.2 C24.2 C25.2 C26.2 C27.1 C28.2 C29.2 C30.2 C31.1 C32.2 C33.1 C34.2 C35.1 F1.3 J3.2 L4.1 L6.2 R7.2 R8.2 R9.2 R10.1 U1.2 U1.4 U1.7 U2.2 U3.3 U3.8 U3.12 U3.28 U3.29 U4.31 U4.45 U4.49 U5.5 U5.12 U5.13 U6.2 U7.3 U8.2 U8.3 U9.3 X1.2 X3.2 X3.4 | length 1757.8
  Top Layer w6: L4.1 C23.2 ; C14.2 X3.4 ; C18.2 221.5,179.13 v1(221.5,149.8) ; v1(268.5,146.06) 268.5,135.89 272.69,131.7 272.69,120.78 274.84,118.62 X3.2@280,118.62 ; X3.2 280,111.5 X3.2@280,118.62 ; U4.31 358.27,304.25 v1(366.14,312.13) ; C15.2 289.25,109.37 X3.2@280,118.62 ; C19.1 388,102 381,109 381,154 391,164 450,164 455.51,169.51 U4.45 455.51,241.5 v1(466.14,252.13) ; C26.2 C27.1 ; C3.1 C2.2 ; v1(569.8,548.5) 574.94,548.5 585.44,538 625.58,538 630,533.58 X1.2 ; C1.2 v1(680,507) ; v1(715.51,82.6) 755.4,82.6 763,75 763,34 775,22 851.37,22 C6.2 ; C5.1 C4.2 ; v1(770,350) U3.29@791.97,350 ; U3.12 783.23,358.74 U3.29@791.97,350 ; C8.2 848.18,151.19 848.18,131.82 859.37,120.63 C10.2 C9.2 ; U3.28 861.97,280 U3.29@822.6,319.37 ; U3.8 861.97,398.11 U3.29 ; U3.3 U3.29@822.6,319.37 ; U3.29@791.97,350 U3.29 ; U3.29 U3.29@822.6,319.37
  Bottom Layer w6: C30.2 C31.1 190.37,511 v1(214,511) 214.82,511.82 231.19,511.82 C33.1 ; U1.4 373.31,104.41 390,121.09 U1.7 U1.2 ; v1(715.51,82.6) 715.51,101.14 R8.2 ; C34.2 C35.1 ; U5.5 U5.12 ; L6.2 v1(889,90)
  other v1: 247,39 896,43 582,103 160,130 644,197 160,200 366.14,252.13 416.14,252.13 120,270 180,270 780,290 416.14,312.13 466.14,312.13 155,358 366.14,372.13 416.14,372.13 466.14,372.13 899,460 120,527 600,590 744,601
LBSEL: C28.1 D3.A R5.1 R6.2 U5.1 U5.3 U5.4 U5.8 | length 2030.1
  Top Layer w6: D3.A 98,517 113,502 178,502 180,500 v1(180,480) ; v1(529,25) 533.01,25 542.01,16 626,16 v1(661,51) ; v1(690,240) 693.64,236.36 708.64,236.36 729,216 729,161 751,139 751,118 789,80 824,80 v1(825.3,78.7)
  Bottom Layer w6: v1(180,480) 150,480 140,470 140,440 190,390 247,333 247,93 300,40 509.35,40 524.35,25 v1(529,25) ; R6.2@680,176 668.5,187.5 668.5,218.5 v1(690,240) ; U5.8 692.37,160.63 R6.2 677,168 658,168 C28.1 658.81,151.19 658.81,53.19 v1(661,51) 666.14,51 677.95,39.19 801.19,39.19 806,44 806,50 784.96,71.04 R5.1 790.54,105.89 790.54,140.62 U5.4 792.79,142.87 806.49,142.87 810,146.38 810,155.19 806.49,158.71 792.79,158.71 U5.3 ; U5.1 816.97,200 834,182.97 834,110.06 825.3,101.36 v1(825.3,78.7)
LED_BLE: D2.K U4.22 | length 401.8
  Top Layer w6: D2.K 48.47,434.12 48.47,414.43 51.99,410.92 211.32,410.92 270.41,470 350,470 361.02,458.98 U4.22
LED_IND: D1.K U4.23 | length 444.4
  Top Layer w6: D1.K 23.67,416.33 41.08,398.92 218.92,398.92 278,458 341.4,458 344.92,454.49 344.92,428.63 U4.23
MAX30003_CS: U3.15 U4.9 | length 197
  Top Layer w6: U4.9 561.9,351.5 608.52,398.11 U3.15
MAX30003_F_CLOCK: C1.1 U3.14 X1.1 | length 117.2
  Top Layer w6: X1.1 C1.1 720,440 728.03,431.97 U3.14
MAX30003_INT1: U3.21 U4.4 | length 180.7
  Top Layer w6: U4.4 602.76,272.76 610,280 U3.21
MAX30003_INT2: U3.20 U4.5 | length 182.3
  Top Layer w6: U4.5 598.5,288.5 608,298 708.32,298 U3.20
MCU_ENABLE_ECG: U2.3 U4.12 X1.3 | length 701.2
  Top Layer w6: U4.12@532.25,399.61 532.25,422.25 548.5,438.5 v1(549.34,438.5) ; U4.12 U4.12@532.28,399.57 ; v1@549.34,439.5 550,440.16 550,500 560.87,510.87 X1.3 ; v1(625,93) 651,93 688.02,55.98 704.73,55.98 U2.3
  Bottom Layer w6: v1(549.34,438.5) 528.5,438.5 520,430 520,310 550,280 550,150 575,125 616.49,125 625,116.49 v1(625,93)
MCU_ENABLE_VCC: R10.2 U4.14 U9.2 | length 190.6
  Top Layer w6: U4.14 487.37,428.63 487.37,447.37 v1(510,470)
  Bottom Layer w6: v1(510,470) 513.64,466.36 528.14,466.36 534.5,460 570,460 580,450 597.4,450 R10.2 597.4,452.6 U9.2@597.4,490
NetC7_2: C7.2 U3.11 | length 76.6
  Top Layer w6: U3.11 802.91,472.91 813,483 C7.2 ; C7.2@808,499 C7.2@810.91,496.09
NetC8_1: C8.1 U3.23 | length 113
  Top Layer w6: U3.23 763.54,176.46 780,160 C8.1
NetC9_1: C9.1 U3.27 | length 142.3
  Top Layer w6: U3.27 842.28,209.72 850,202 898,202 910,190 C9.1
NetC10_1: C10.1 U3.25 | length 147.4
  Top Layer w6: U3.25 802.91,207.09 820,190 870,190 880,180 C10.1
NetC11_1: C11.1 U3.9 | length 95.6
  Top Layer w6: U3.9 842.28,462.28 850,470 870,470 880,480 880,499.37 C11.1@879.37,500
NetC11_2: C11.2 U3.10 | length 75.2
  Top Layer w6: U3.10 822.6,462.6 840,480 C11.2@840,500
NetC12_2: C12.2 U4.3 X2.1 | length 121.9
  Top Layer w6: U4.3 612.99,257.01 C12.2 620,230 X2.1@612,222
NetC13_2: C13.2 U4.2 X2.2 | length 150
  Top Layer w6: U4.2 532.64,240.9 559.1,240.9 570,230 570,197 576.28,190.72 X2.2 ; C13.2 X2.2@620,180
NetC14_1: C14.1 U4.34 X3.3 | length 219.5
  Top Layer w6: C14.1 X3.3 247,113 247,237 267.01,257.01 U4.34
NetC15_1: C15.1 U4.35 X3.1 | length 286.9
  Top Layer w6: X3.1 282.13,70 C15.1 330,70 347,87 347,126 270,203 270,237.75 273.51,241.26 U4.35
NetC16_1: C16.1 U4.1 | length 83
  Top Layer w6: U4.1 532.28,197.72 550.32,179.69 C16.1
NetC17_1: C17.1 U4.32 | length 272.1
  Top Layer w6: C17.1 198.81,98.81 198.81,101.95 199.19,102.33 199.19,235.54 204.46,240.81 210.81,240.81 258.5,288.5 U4.32
NetC18_1: C18.1 U4.33 | length 107.7
  Top Layer w6: C18.1 227.17,227.17 227.17,237.17 262.76,272.76 U4.33
NetC22_1: C22.1 F1.2 | length 40.6
  Top Layer w4: C22.1 F1.2
NetC22_2: C22.2 C23.1 L3.1 L4.2 | length 110.6
  Top Layer w4: L3.1 L4.2 C23.1 C22.2
NetC24_1: C24.1 C29.1 L6.1 U5.11 | length 408.5
  Bottom Layer w6: U5.11 745.59,316.49 749.11,320 856.17,320 859.68,316.49 C24.1 859.68,240 880,240 890,230 L6.1@890,160
NetC25_1: C25.1 C26.1 C27.2 L5.1 U6.5 | length 140
  Top Layer w6: U6.5 C25.1 C27.2 C26.1 L5.1
NetD1_A: D1.A R3.2 | length 48.9
  Top Layer w6: D1.A R3.2
NetD2_A: D2.A R4.2 | length 31
  Top Layer w6: D2.A R4.2@111.02,440
NetD3_K: D3.K U5.2 | length 1469.5
  Top Layer w6: v1(23.5,386.09) 24.32,386.92 v1(246.92,386.92) ; v1(23.5,520) 49.6,520 D3.K
  Bottom Layer w6: v1(23.5,386.09) v1(23.5,520) ; v1(246.92,386.92) 273.08,386.92 300,360 300,260 280,240 280,190 290,180 290,122.7 335.2,77.5 588.5,77.5 640,26 818,26 826,34 826,47.58 803.8,69.77 803.8,96.83 822,115.03 822,170 812,180 791.18,180 U5.2
NetE1_1: E1.1 L3.2 | length 60
  Top Layer w4: E1.1@60,180 L3.2
NetJ1_1: J1.1 U3.7 | length 1117.2
  Top Layer w6: J1.1 110,580 156,626 824,626 840,610 840,540 850,530 910,530 930,510 930,410 919.34,399.34 897.06,399.34 U3.7
NetJ2_1: J2.1 U3.6 | length 253.1
  Top Layer w6: U3.6 928.43,378.43 942,392 942,538 910,570 J2.1@910,580
NetL1_2: L1.2 L2.1 | length 67.5
  Top Layer w6: L2.1 430,60 445,75 L1.2
NetL2_2: L2.2 U4.47 | length 143
  Top Layer w6: L2.2 470,130 487.01,147.01 U4.47
NetR5_2: R5.2 R7.1 U5.6 | length 84.4
  Bottom Layer w6: R5.2@744.96,99.69 R5.2 ; U5.6 R5.2 ; R7.1 766,75 745.59,95.41 R5.2
NetR6_1: R6.1 R8.1 U5.7 | length 70.5
  Bottom Layer w6: R8.1 680,131.63 R6.1 682.97,132.63 691.28,140.94 U5.7
SCL_I2C: R1.2 U1.1 U4.18 | length 461.1
  Top Layer w6: U4.18 424.02,464.02 430,470 v1(470,470)
  Bottom Layer w6: U1.1 428.39,168.39 489.37,229.37 R1.2 510,280 500,290 500,440 v1(470,470)
SDA_I2C: R2.2 U1.6 U4.19 | length 455
  Top Layer w6: v1(390,480) 391.89,480 408.27,463.62 U4.19
  Bottom Layer w6: U1.6 351.61,198.39 340,210 R2.2 320,227.41 332,239.41 332,392 350,410 378,410 390,422 v1(390,480)
SPI_CLK: U3.16 U4.8 | length 195.4
  Top Layer w6: U4.8 565.75,335.75 608.43,378.43 U3.16
SPI_SDI: U3.17 U4.7 | length 193.8
  Top Layer w6: U4.7 570,320 608.74,358.74 U3.17
SPI_SDO: U3.18 U4.6 | length 198.5
  Top Layer w6: U4.6 574.25,304.25 616.74,346.74 643.26,346.74 650.94,339.06 U3.18
V_BATT: C30.1 C31.2 C32.1 C33.2 C34.1 C35.2 J3.1 U2.1 U5.10 U6.1 U7.1 U8.5 U9.5 | length 2396.8
  Top Layer w6: v1(173,600) U6.1 ; v1(690,201) 708,201 715.51,193.49 U2.1
  Bottom Layer w6: U7.1@35.2,590 35.2,588 35.2,554.51 38.71,551 159,551 C30.1 C31.2 210,550 220,560 C33.2 267.4,560 270,562.6 U8.5 ; U7.1 63,588 73,598 73,608 91,626 173,626 634.6,626 ; v1(173,600) 173,624 ; U9.5 634.6,613.95 634.6,626 ; U9.5@634.8,598.27 671.73,598.27 680,590 C35.2 C34.1 727,493 727,449 699.5,421.5 562.75,421.5 540,398.75 540,310 580,270 700,270 720,250 U5.10 719.5,200.5 690.5,200.5 v1(690,201) ; J3.1@900,580 900,622.49 898.24,624.24 896.53,625.95 895.51,626 634.6,626
V_ECG: C4.1 C5.2 C6.1 U2.5 U3.13 U3.22 | length 1134.7
  Top Layer w6: U3.22 743.86,202.9 744,202.76 744,165 779.45,129.55 800.45,129.55 820.05,109.95 840.05,109.95 860,90 C6.1 ; U3.13 763.54,480 763.54,516.46 C4.1 760,558 v1(781,579) ; C6.1@860,68.5 908.91,68.5 946,105.59 946,243.86 934,255.86 v1(934,261)
  Bottom Layer w6: v1(781,579) 781,449 800,430 930,430 946,414 946,326 934,314 v1(934,261)
VCC: C2.1 C3.2 C20.1 C21.1 J3.3 L5.2 R1.1 R2.1 R3.1 R4.1 U1.5 U3.19 U4.13 U4.36 U4.48 X1.4 | length 3200.5
  Top Layer w6: R3.1 148.98,479.61 150,478.58 R4.1 v1(210,440) ; U4.36 300,190 326,164 349,164 360,153 C21.1 380,40 389,31 486.23,31 491.5,36.27 491.5,49.5 510,68 ; L5.2 531.5,510 ; U4.48 502.76,167.53 510,160.28 v1(510,155.14) C2.1 C3.2 510,68 ; U4.13 531.5,457.01 531.5,510 ; v1(580,400) 580,429.37 X1.4 590.63,470.63 600,480 647.14,480 656.08,488.94 656.08,525.07 620.65,560.5 589.5,560.5 580,570 550,570 531.5,551.5 531.5,510 ; v1(582,51) 565,68 510,68 ; v1(635.87,319.8) 636.08,319.58 709.79,319.58 U3.19
  Bottom Layer w6: v1(210,440) 260,440 320,380 320,244.38 299.19,223.57 299.19,191.44 311.19,179.44 311.19,177.47 318.03,170.63 R2.1 320,130 ; U1.5 320,130 ; R1.1@509.56,190 509.56,155.58 v1(510,155.14) 510,110 489.5,89.5 340.17,89.5 320,109.67 320,130 ; v1(580,400) 580,340 600,320 635.67,320 v1(635.87,319.8) 669.8,319.8 C20.1 670,350 700,380 J3.3 899,260 940,219 940,41 919,20 845,20 839,14 634,14 598.7,49.3 583.7,49.3 v1(582,51)
pads on no net: E1.2 U1.3 U2.4 U3.1 U3.2 U3.4 U3.5 U3.24 U3.26 U4.10 U4.11 U4.15 U4.16 U4.17 U4.20 U4.21 U4.24 U4.25 U4.26 U4.27 U4.28 U4.29 U4.37 U4.38 U4.39 U4.40 U4.41 U4.42 U4.43 U4.44 U5.9 U6.4

## Polygon pours and split planes (outlines as drawn)
GND on Bottom Layer "GND_L02_P001" (hatched 45Degree grid 20 track 6, remove dead copper, pour order 1): 130,0 130,240 0,240 0,640 960,640 960,0
GND on Top Layer "GND_L01_P000" (hatched 45Degree grid 20 track 6, remove dead copper, pour order 0): 130,10.1 130,240 0,240 0,640 960,640 960,1.96

## Keep-outs
Keep-Out Layer:
  the board outline again, w10

## Silkscreen, mask and mechanical layers (free items; w line width, h text height)
Top Overlay:
  lines w10: 0,64.29 ccw(c64.12,64.29) 64.12,0.17 891.83,0.07 ccw(c891.83,68.24) 960,68.24 960,575.51 ccw(c895.51,575.51) 895.51,640 110,640 64.49,640 ccw(c64.49,575.51) 0,575.51 0,550 0,64.29 ; 960,520 ccw(c960,520) 960,520
Bottom Overlay:
  lines w10: 0,64.49 ccw(c64.49,64.49) 64.49,0 74.49,0 891.72,0 ccw(c891.72,68.28) 960,68.28 960,575.51 ccw(c895.51,575.51) 895.51,640 64.49,640 ccw(c64.49,575.51) 0,575.51 0,74.49 0,64.49
Board_Outline:
  lines w10: 895.55,640 64.49,640 ccw(c64.49,575.51) 0,575.51 0,64.49 ccw(c64.49,64.49) 64.49,0 895.51,0 ccw(c895.51,64.49) 960,64.49 960,575.54 cw(c960.05,575.54) 960.05,575.59 ccw(c895.55,575.59) 895.55,640.08